# EAGLE board 1.5-Volt-Headphone-Amplifier (EAGLE 7.2.0)

No outline drawn. Coordinates in mm, seen from the top.
Copper layers (1*16): Top 0.035mm / dielectric 1.5mm / Bottom 0.035mm
Design rules "default": minimum track width 10mil, minimum drill 24mil, track to track 8mil, track to pad 8mil, pad to pad 8mil, via to via 8mil, smd to smd 8mil, copper to edge 40mil, drill to drill 8mil, minimum pad ring 10mil, minimum via ring 8mil, stop-mask expansion 4mil, vias tented up to drill 0mil, thermal gap 10mil

## Footprints (pad centres in the part's own frame; a part is rotated, then mirrored left to right if it is on the bottom)
C050-025X075/V = drill 0.9 pad 1.778: 1 0,2.54; 2 0,-2.54
E2,5-5 = drill 0.9 square: + 1.27,0 | drill 0.9 pad 1.778: - -1.27,0
E2,5-5/V = drill 0.9 square: + 0,-1.27 | drill 0.9 pad 1.778: - 0,1.27
SPAD = drill 0.9 pad 1.778: 1 0,0
SPAD+- = drill 0.9 pad 1.778 square: 1 0,-1.27 | drill 0.9 pad 1.778: 2 0,1.27
TRIM-POT = drill 0.9 pad 1.778: A -2.54,0; E 2.54,0; S 0,0
0204/10-V = drill 0.9 pad 1.778: 1 0,5.08; 2 0,-5.08
0204/10 = drill 0.9 pad 1.778: 1 -5.08,0; 2 5.08,0
TO92-EBC-A = drill 0.9 pad 1.778: B -2.54,0; C 0,2.54; E 0,-2.54
TO92-EBC = drill 0.9 pad 1.778: B 0,0; C 0,2.54; E 0,-2.54

## Placement (x,y rotation side)
C1  100nF  [C050-025X075/V]  -17.78,17.78 0 top
C2  [C050-025X075/V]  -29.21,16.51 0 top
C3  10μF  [E2,5-5]  -41.91,29.21 0 top
C4  10u  [E2,5-5/V]  -22.86,36.83 0 top
C5  1u  [C050-025X075/V]  -21.59,17.78 0 top
C6  10μF  [E2,5-5]  -16.51,36.83 0 top
C7  0.1μF  [C050-025X075/V]  -25.4,17.78 0 top
J1  IN  [SPAD]  -39.37,44.45 0 top
J2  HDPH  [SPAD+-]  -29.21,36.83 0 top
R1  100kΩ  [TRIM-POT]  -36.83,35.56 0 top
R2  100kΩ  [0204/10-V]  -29.21,6.35 0 top
R3  2.2kΩ  [0204/10-V]  -33.02,6.35 0 top
R4  1kΩ  [0204/10-V]  -36.83,6.35 0 top
R5  100kΩ  [0204/10-V]  -40.64,6.35 0 top
R6  100Ω  [0204/10-V]  -44.45,6.35 0 top
R7  1kΩ  [0204/10]  -19.05,41.91 0 top
R8  100kΩ  [0204/10-V]  -13.97,19.05 0 top
R9  1kΩ  [0204/10]  -31.75,41.91 0 top
R10  4.7kΩ  [0204/10-V]  -13.97,6.35 0 top
R11  10kΩ  [0204/10-V]  -25.4,6.35 0 top
R12  10kΩ  [0204/10-V]  -17.78,6.35 0 top
R13  330kΩ  [0204/10]  -19.05,44.45 0 top
R14  100kΩ  [0204/10-V]  -21.59,6.35 0 top
R15  10kΩ  [0204/10]  -31.75,44.45 0 top
T1  2N3904-A  [TO92-EBC-A]  -34.29,16.51 0 top
T2  2N3906-A  [TO92-EBC-A]  -40.64,16.51 0 top
T3  2N3906-A  [TO92-EBC-A]  -16.51,29.21 0 top
T4  2N3904-A  [TO92-EBC-A]  -22.86,29.21 0 top
T5  2N3904-A  [TO92-EBC-A]  -29.21,29.21 0 top
T6  2N3904EBC  [TO92-EBC]  -35.56,29.21 0 top

## Library data of the parts
C1-C7 = c
J1 J2 = pad
R1-R15 = r
T1-T6 = t

## Nets
GND: C7.2 R1.A R3.2 R5.2 R8.2 R10.2 R14.2 T5.E T6.E
N$1: C1.2 R1.E
N$2: C2.1 R1.S
N$3: C2.2 R2.2 T1.B
N$4: C3.+ R3.1 T1.E
N$5: C3.- C4.+
N$6: C4.- R4.2
N$7: R4.1 T2.C T6.B
N$8: R7.1 T2.B
N$9: R6.2 T2.E
N$10: R9.1 T3.B
N$11: C1.1 J1.1
N$12: C5.2 R7.2 R8.1 T3.C
N$13: R10.1 T4.E
N$15: R11.2 R12.1 T4.B T5.C
N$16: C6.- R9.2 R15.1 T4.C
N$17: R12.2 R13.1 R14.1 T5.B
N$18: C7.1 J2.1 R15.2 T6.C
VCC: C5.1 C6.+ J2.2 R2.1 R6.1 R11.1 R13.2 T1.C T3.E

## Tracks (layer width: path | path; a pad name or v marks a point on that pad's centre or on a via)
GND  (8 unrouted)
N$1  (1 unrouted)
N$2  (1 unrouted)
N$3  (2 unrouted)
N$4  (2 unrouted)
N$5  (1 unrouted)
N$6  (1 unrouted)
N$7  (2 unrouted)
N$8  (1 unrouted)
N$9  (1 unrouted)
N$10  (1 unrouted)
N$11  (1 unrouted)
N$12  (3 unrouted)
N$13  (1 unrouted)
N$15  (3 unrouted)
N$16  (3 unrouted)
N$17  (3 unrouted)
N$18  (3 unrouted)
VCC  (8 unrouted)